# Altium PCB Adafruit AT42QT1010 Breakout.PcbDoc
Units mil, origin at the board's own origin, x right, y up, seen from the top; angles counter-clockwise.
Board outline 800 x 1100 mil, 2 copper layers (Top, Bottom); 17 components, 8 nets, 35 pads, 2 vias.
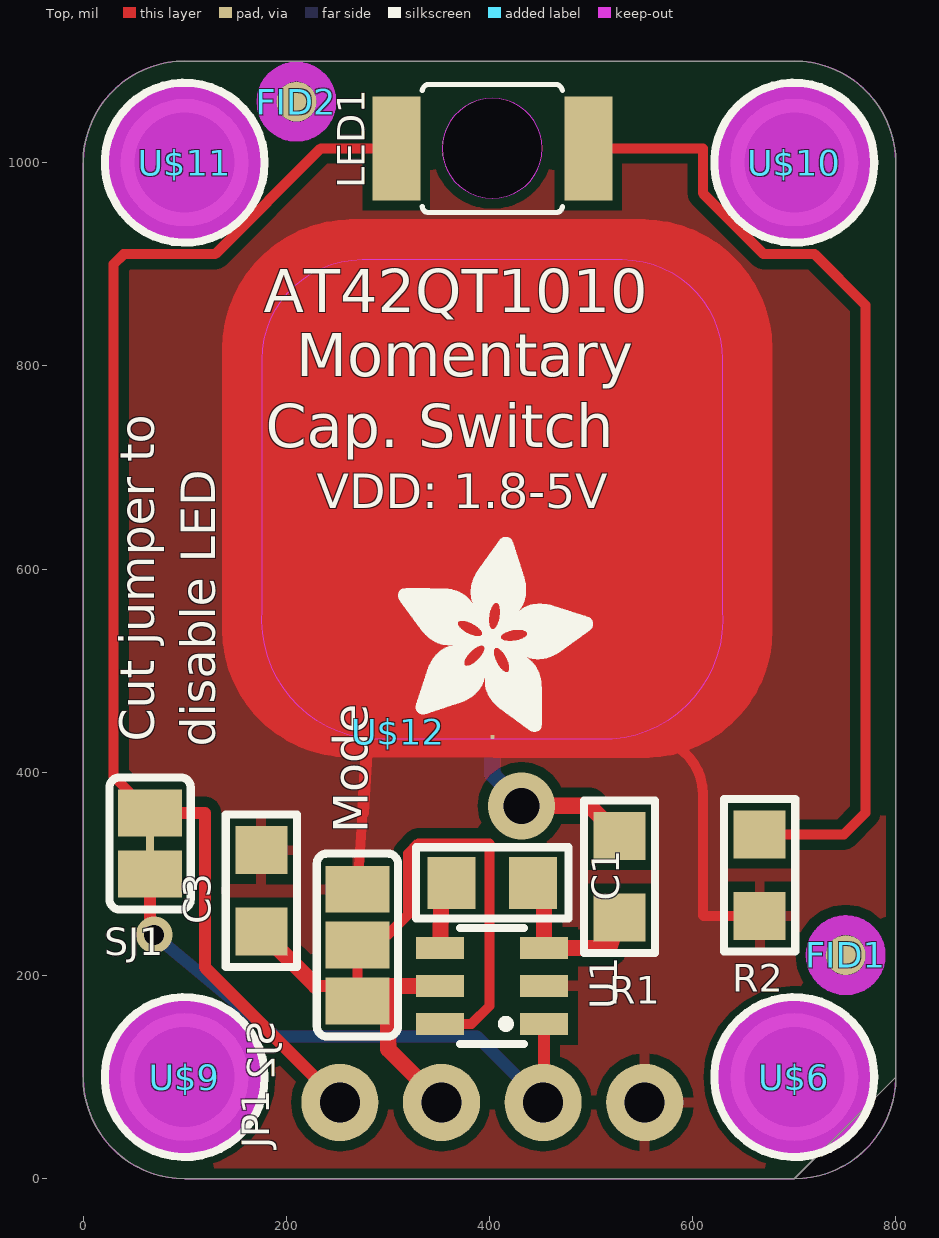
[diagram p0: Top view]
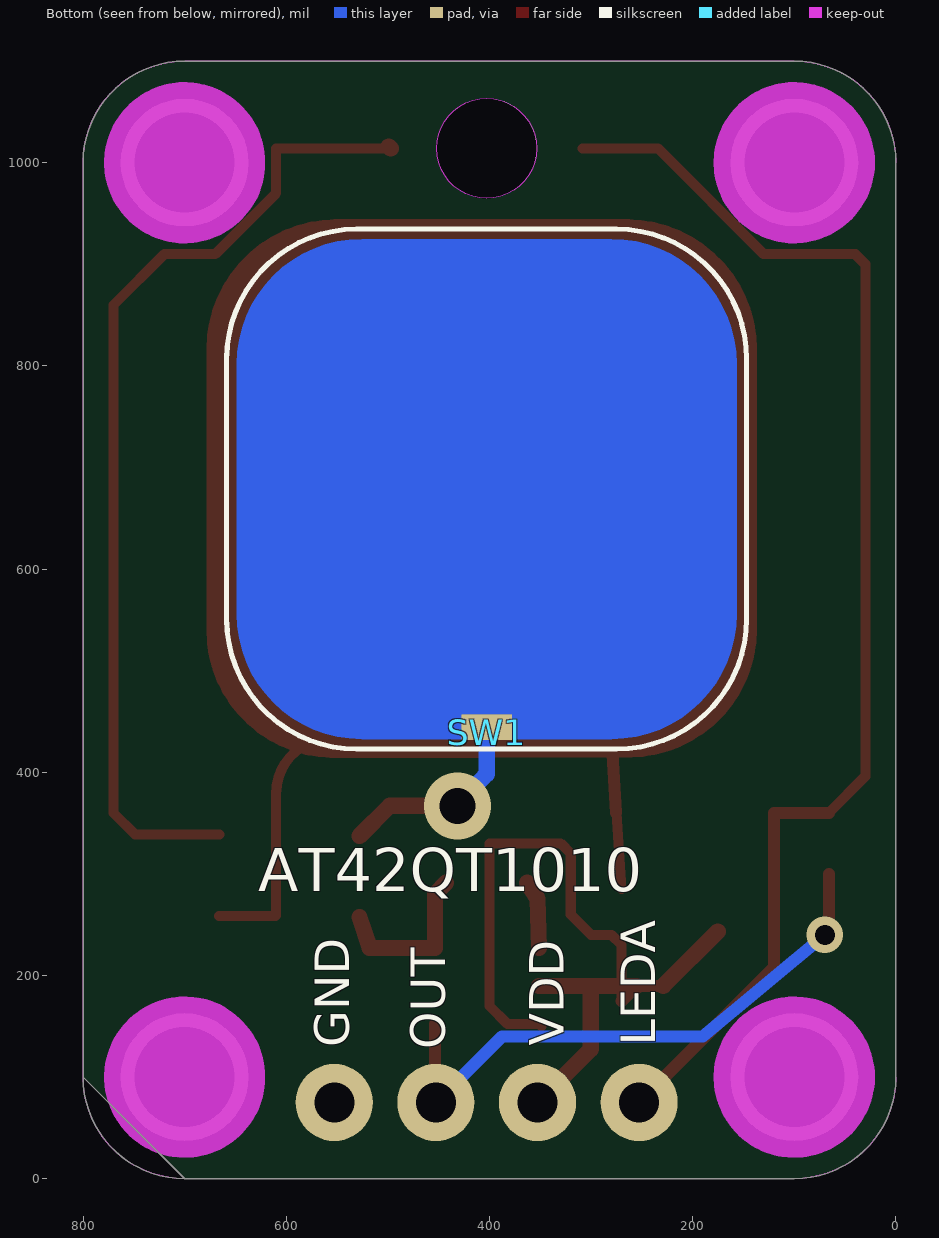
[diagram p1: Bottom view, seen from below]

## Layer stack, top to bottom
Top Solder: solder mask 0.4, Solder Resist, Dk 3.5
Top: signal copper 1.378
Dielectric 1: dielectric 12.6, FR-4, Dk 4.8
Bottom: signal copper 1.378
Bottom Solder: solder mask 0.4, Solder Resist, Dk 3.5

## Board outline
800,100 cw(c700,100) 700,0 100,0 cw(c100,100) 0,100 0,1000 cw(c100,1000) 100,1100 700,1100 cw(c700,1000) 800,1000 800,100 cw(c700,100)
cut-out: 402.76,964.85 ccw(c402.76,1014.06) 451.98,1014.06 ccw(c402.76,1014.06) 402.76,1063.28 ccw(c402.76,1014.06) 353.55,1014.06 ccw(c402.76,1014.06)

## Design rules (kind name [scope] priority, off if disabled: settings)
BoardOutlineClearance mdCopperDimension [All] p1: gap=10 ignorepadtopadclearanceinfootprint=FALSE except(0: Arc-SplitContinuation Track-SplitContinuation SMDPad-SplitContinuation THPad-SplitContinuation Via-SplitContinuation Fill-SplitContinuation Poly-SplitContinuation Region-SplitContinuation Text-SplitContinuation)
Clearance Clearance_for_PolygonClass_Isolate_10 [InPolygonClass('Isolate_10') vs IsArc Or IsTrack Or IsPad Or IsVia Or IsFill Or IsRegion Or IsText] p1: gap=10 ignorepadtopadclearanceinfootprint=FALSE
Clearance "Clearance (Same Net)" [All] p2: gap=8 ignorepadtopadclearanceinfootprint=FALSE
Clearance [All] p3: gap=8 ignorepadtopadclearanceinfootprint=FALSE
HoleSize [All] p1: absolutevalues=TRUE maxlimit=100000 minlimit=16 maxpercent=80.000 minpercent=20.000
HoleToHoleClearance mdDrill [All] p1: gap=8 allowstackedmicrovias=TRUE
MinimumSolderMaskSliver [All] p1 off: minsoldermaskwidth=10
PasteMaskExpansion Expansion_SMDPaste_OFF [InPadClass('SMDPaste_OFF')] p1: expansion=0
PasteMaskExpansion mlMinCreamFrame [All] p2: expansion=0
PolygonConnect PolygonConnect_For_PolygonThermal_ON_Width100000_Gap100000 [InPolygonClass('PolygonThermal_ON_Width100000_Gap100000') vs Not IsVia] p1: connectstyle=Relief reliefconductorwidth=10 reliefentries=4 polygonreliefangle="90 Angle" airgapwidth=10
PolygonConnect ThermalVias [IsVia] p2: connectstyle=Direct reliefconductorwidth=10 reliefentries=4 polygonreliefangle="90 Angle" airgapwidth=10
PolygonConnect [All] p3: connectstyle=Relief reliefconductorwidth=10 reliefentries=4 polygonreliefangle="90 Angle" airgapwidth=10
RoutingVias [All] p1: holewidth=16 width=32 viastyle="Through Hole" minholewidth=16 minwidth=32 maxholewidth=100 maxwidth=100
SolderMaskExpansion Expansion_SMDSolder_OFF [InPadClass('SMDSolder_OFF')] p1: expansion=0
SolderMaskExpansion mlMinStopFrame [All] p2: expansion=4
Width [All] p1: maxlimit=10000 minlimit=8 preferedwidth=8
26 further rules are at their usual default settings.

## Classes and differential pairs
polygon class PolygonThermal_ON_Width100000_Gap100000: Polygon_1_Net_GND
polygon class Isolate_10: Polygon_1_Net_GND
pad class SMDSolder_OFF: SW1-E SW1-G
pad class SMDPaste_OFF: FID1-1 FID2-1 SJ1-1 SJ1-2 SJ1-WIRE SJ2-1 SJ2-3

## Components (designator, comment, footprint, x,y, rotation, side; value= is the part's Value field where it differs from the comment)
C1 "22nF" _0805 402.76,291.18 r180 top
C3 "0.1µF" _0805 175.43,283.31 r90 top
FID1 "" FIDUCIAL_1MM 750.63,220 r0 top
FID2 "" FIDUCIAL_1MM 210,1060 r0 top
JP1 "" 1X04_ROUND_76 402.76,75 r0 top
LED1 "LS T77K-J1L2-1-0-2-R18-Z" PLCC2_REVMOUNT 402.76,1014.06 r180 top
R1 "10K" _0805 527.95,297.24 r90 top
R2 "1K" _0805 665.91,298.7 r270 top
SJ1 "LED" SOLDERJUMPER_CLOSEDWIRE 65.94,330 r90 top
SJ2 "MODE" SOLDERJUMPER_2WAY_OPEN_NOPASTE 270,230 r90 top
SW1 "" CAPTOUCH_SIMPLE_12.5MM 402.76,678.74 r180 bottom
U1 "AT42QT1010" SOT23-6 402.36,189.76 r90 top
U$6 "" MOUNTINGHOLE_2.5_PLATED 700,100 r0 top
U$9 "" MOUNTINGHOLE_2.5_PLATED 100,100 r0 top
U$10 "" MOUNTINGHOLE_2.5_PLATED 700,1000 r0 top
U$11 "" MOUNTINGHOLE_2.5_PLATED 100,1000 r0 top
U$12 "" ADAFRUIT_5MM 310,440 r0 top

## Footprints (in the part's own frame and the unit in brackets; to place one, negate y for a bottom-side part, rotate by r counter-clockwise, add the part's x,y. Pads: shape width x height; smd on the part's side, far side on the other; paste and mask are expansions set on the pad)
1X04_ROUND_76 [mil] "1X04_ROUND_76"
  round 76 / inner round 60 / far side round 76 hole 39.37: 1(-150,0) 2(-50,0) 3(50,0) 4(150,0)
_0805 [mil] "_0805"
  rect 47.24x51.18 smd: 1(-40,0) 2(40,0)
  silkscreen extent -75,-35 75,35
ADAFRUIT_5MM [mil] "ADAFRUIT_5MM"
  silkscreen extent 0,0 192,192
CAPTOUCH_SIMPLE_12.5MM [mil] "CAPTOUCH_SIMPLE_12.5MM"
  rect 50x25 smd mask-25: E(0,-234.25)
  rect 3.94x3.94 smd far side mask-1.97: G(0,-244.09)
  Top region: -246.06,123.03 -236.69,170.11 -210.03,210.03 -170.11,236.69 -123.03,246.06 -123.03,246.06 123.03,246.06 170.11,236.69 210.03,210.03 236.69,170.11 246.06,123.03 246.06,123.03 246.06,-123.03 236.69,-170.11 210.03,-210.03 170.11,-236.69 123.03,-246.06 123.03,-246.06 -123.03,-246.06 -170.11,-236.69 -210.03,-210.03 -236.69,-170.11 -246.06,-123.03 -246.06,-123.03 -246.06,123.03
  Bottom region: -246.06,123.03 -236.69,170.11 -210.03,210.03 -170.11,236.69 -123.03,246.06 -123.03,246.06 123.03,246.06 170.11,236.69 210.03,210.03 236.69,170.11 246.06,123.03 246.06,123.03 246.06,-123.03 236.69,-170.11 210.03,-210.03 170.11,-236.69 123.03,-246.06 123.03,-246.06 -123.03,-246.06 -170.11,-236.69 -210.03,-210.03 -236.69,-170.11 -246.06,-123.03 -246.06,-123.03 -246.06,123.03
  silkscreen extent -256,-256 256,256
FIDUCIAL_1MM [mm] "FIDUCIAL_1MM"
  rrect100% 1x1 smd paste-0.5: 1(0,0)
  Top keep-out lines w0.5: -0.75,0 ccw(c0,0) 0,-0.75 ; -0.75,0 cw(c0,0) 0,0.75 ; -0.75,0 ccw(c0,0) 0,-0.75 ; -0.75,0 cw(c0,0) 0,0.75 ; 0,-0.75 ccw(c0,0) 0.75,0 ; 0,-0.75 ccw(c0,0) 0.75,0 ; 0,0.75 cw(c0,0) 0.75,0 ; 0,0.75 cw(c0,0) 0.75,0
MOUNTINGHOLE_2.5_PLATED [mil] "MOUNTINGHOLE_2.5_PLATED"
  round 125.98 / inner round 60 / far side round 125.98 hole 98.43: P$1(0,0)
  Top keep-out circle w80: c0,0 r39.37
  Top keep-out circle w80: c0,0 r39.37
  Bottom keep-out circle w80: c0,0 r39.37
  Bottom keep-out circle w80: c0,0 r39.37
  silkscreen extent -79,-79 79,79
PLCC2_REVMOUNT [mil] "PLCC2_REVMOUNT"
  rect 47.24x102.36 smd: A(94.49,0) K(-94.49,0)
  silkscreen extent -69,-63 69,63
SOLDERJUMPER_2WAY_OPEN_NOPASTE [mil] "SOLDERJUMPER_2WAY_OPEN_NOPASTE"
  rect 46x63 smd paste-31.5: 1(-55,0) 3(55,0)
  rect 46x63 smd: 2(0,0)
  silkscreen extent -90,-40 90,40
SOLDERJUMPER_CLOSEDWIRE [mil] "SOLDERJUMPER_CLOSEDWIRE"
  rect 46x63 smd paste-31.5: 1(-30,0) 2(30,0)
  rect 25x8 smd paste-12.5: WIRE(0,0)
  silkscreen extent -65,-40 65,40
SOT23-6 [mil] "SOT23-6"
  rect 21.65x47.24 smd: 1(-37.4,-51.18) 2(0,-51.18) 3(37.4,-51.18) 4(37.4,51.18) 5(0,51.18) 6(-37.4,51.18)
  silkscreen extent -57,-32 57,32

## Part data
C1 C3 R1 R2: library part _0805, PackageName=_0805, OriginalSource=Eagle
FID1 FID2: library part FIDUCIAL_1MM, PackageName=FIDUCIAL_1MM, OriginalSource=Eagle
JP1: library part 1X04_ROUND_76, PackageName=1X04_ROUND_76, OriginalSource=Eagle
LED1: library part PLCC2_REVMOUNT, PackageName=PLCC2_REVMOUNT, OriginalSource=Eagle
SJ1: library part SOLDERJUMPER_CLOSEDWIRE, PackageName=SOLDERJUMPER_CLOSEDWIRE, OriginalSource=Eagle
SJ2: library part SOLDERJUMPER_2WAY_OPEN_NOPASTE, PackageName=SOLDERJUMPER_2WAY_OPEN_NOPASTE, OriginalSource=Eagle
SW1: library part CAPTOUCH_SIMPLE_12.5MM, PackageName=CAPTOUCH_SIMPLE_12.5MM, OriginalSource=Eagle
U1: library part SOT23-6, PackageName=SOT23-6, OriginalSource=Eagle
U$6 U$9 U$10 U$11: library part MOUNTINGHOLE_2.5_PLATED, PackageName=MOUNTINGHOLE_2.5_PLATED, OriginalSource=Eagle
U$12: library part ADAFRUIT_5MM, PackageName=ADAFRUIT_5MM, OriginalSource=Eagle

## Free pads (board coordinates)
  round 98.43 hole 98.43 unplated: MH1(402.76,1014.06)

## Via types
v1: diameter 35.69/35.69 (per signal layer), hole 19.69, Top to Bottom, tented both sides, 1 vias
v2: diameter 66/66 (per signal layer), hole 35.43, Top to Bottom, 1 vias

## Nets (pads, with @x,y where several pads share a name; then routed paths per layer and width w, separated by ;. In a path a pad name is that pad's centre, name@x,y a point inside that pad or via, vN(x,y) a via of type N, cw(c..) or ccw(c..) an arc to the next point about the centre after c; other vN are vias at no path point)
CAPPAD: R1.2 SW1.E | length 197.5
  Top w16: v2(431.57,367.01) 498.19,367.01 R1.2
  Bottom w16: SW1.E 402.76,398.19 v2(431.57,367.01)
GND: C3.2 JP1.4 R2.2 SJ2.3 SW1.G U1.2 | length 2212.4
  Top w10: SJ2.3 275.08,360.08 275.43,360.08 ; 554.33,434.25 cw(c554.33,378.58) 610,378.58 610,260 ccw(c611.3,260) 611.3,258.7 R2.2
  Top w12: 275.43,360.08 280,434.65
  Top w40: SW1.G 280,434.65 262.6,434.65 cw(c262.6,540.55) 156.69,540.55 156.69,816.14 cw(c264.96,816.14) 264.96,924.41 550.39,924.41 ; 406.69,434.25 554.33,434.25 ccw(c553.35,539.57) 658.66,540.55 658.66,816.14 ccw(c550.39,816.14) 550.39,924.41 ; 552.36,922.44 cw(c552.36,924.41) 550.39,924.41
LEDA: JP1.1 LED1.A SJ1.2 | length 1274.5
  Top w10: SJ1.2 30,395.94 30,900 40,910 130,910 234.06,1014.06 LED1.A
  Top w12: SJ1.2 120,360 120,207.76 JP1.1
N$3: C1.2 U1.4 | length 67
  Top w16: U1.4 352.76,275.59 C1.2
N$4: C1.1 R1.1 U1.3 | length 164.6
  Top w16: C1.1 453.54,280.39 U1.3 518.03,227.17 R1.1
N$6: LED1.K R2.1 | length 977.9
  Top w10: LED1.K 610,1014.06 610,970 670,910 720,910 770,860 770,360 748.7,338.7 R2.1
  Top w16: LED1.K LED1.K@499.09,1015.91
OUT: JP1.3 SJ1.1 SJ1.WIRE U1.1 | length 584.1
  Top w12: SJ1.1 65.94,254.06 v1(70,240) ; JP1.3 453.54,75.79 U1.1
  Bottom w12: v1(70,240) 190,140 387.76,140 JP1.3
VDD: C3.1 JP1.2 SJ2.1 SJ2.2 U1.5 U1.6 | length 837.9
  Top w10: SJ2.1 270,189.76 270,199.76 SJ2.2 280,240 300,240 320,260 320,320 330,330 400,330 400,170 382.36,152.36 U1.6 U1.6@348.82,150
  Top w12: 228.98,189.76 255.24,189.76 SJ2.1
  Top w16: C3.1 228.98,189.76 ; SJ2.1@255.24,189.76 270,189.76 304.33,189.76 ; U1.5 304.33,189.76 ; JP1.2 300.39,127.36 300.39,185.83 304.33,189.76
pads on no net: FID1.1 FID2.1 U$6.P$1 U$9.P$1 U$10.P$1 U$11.P$1

## Polygon pours and split planes (outlines as drawn)
GND on Top "Polygon_1_Net_GND" (solid, remove dead copper, pour order 0): -5,-5 -5,1135 805,1135 805,-5

## Keep-outs
Top:
  region: 176.38,806.3 cw(c274.8,806.3) 274.8,904.72 530.71,904.72 cw(c530.71,806.3) 629.13,806.3 629.13,560.24 cw(c511.02,550.39) 520.87,432.28 284.65,432.28 cw(c294.5,550.39) 176.38,560.24 176.38,806.3
Keep-Out Layer:
  the board outline again, w0

## Silkscreen, mask and mechanical layers (free items; w line width, h text height)
Top Overlay:
  text "AT42QT1010" at 177.76,852.95 h42.5
  text "Momentary" at 210,790 h42.5
  text "Cap. Switch" at 180,720 h42.5
  text "VDD: 1.8-5V" at 230,660 h34
  text "Cut jumper to" at 70,430 h34 r90
  text "disable LED" at 130,425 h34 r90
  text "Mode" at 280,340 h34 r90
Bottom Overlay:
  text "AT42QT1010" at 627.76,282.95 h42.5
  text "LEDA" at 237.09,130.71 h34 r270
  text "VDD" at 327.09,130.71 h34 r270
  text "GND" at 537.87,129.13 h34 r270
  text "OUT" at 443.78,127.56 h34 r270
Dimension:
  the board outline again, w0

## Text inside footprints (layer, text, board x,y; h text height)
SJ2: tDocu "3" at 295,330 h42.5 r90; tDocu "1" at 295,100 h42.5 r90